# EAGLE board ADXL344 (EAGLE 8.4.3)
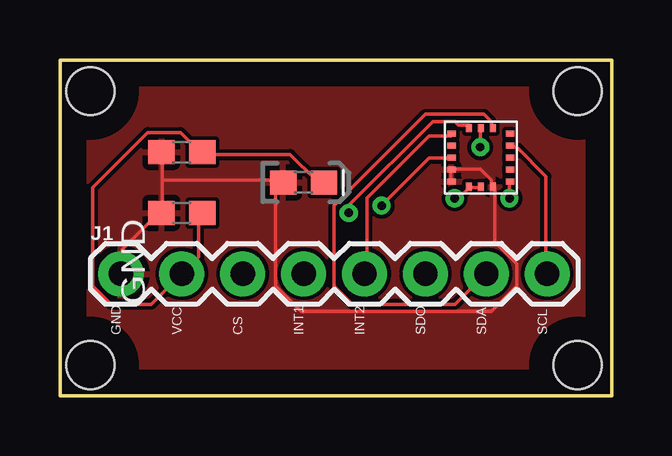
[diagram p0: board, top side]
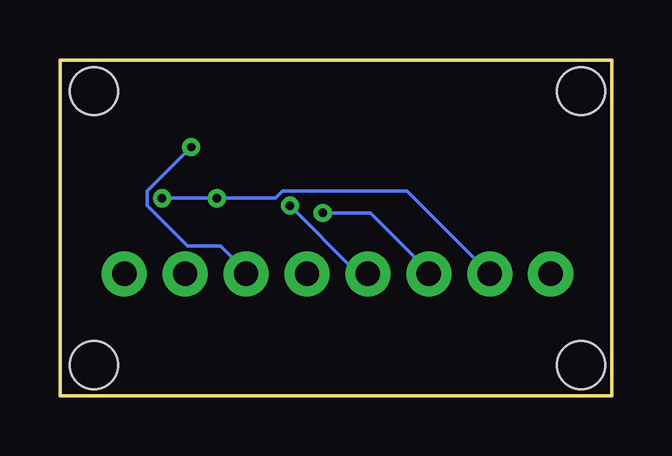
[diagram p1: board, bottom side, seen from below]

Size 23 x 14 mm. Coordinates in mm from the lower left corner, seen from the top.
Outline: 0,0 23,0 23,14 0,14 0,0
Copper layers (1*16): Top 0.035mm / dielectric 1.5mm / Bottom 0.035mm
Design rules "default": minimum track width 6mil, minimum drill 0.35mm, track to track 6mil, track to pad 6mil, pad to pad 6mil, via to via 6mil, smd to smd 6mil, copper to edge 40mil, drill to drill 6mil, minimum pad ring 10mil, minimum via ring 8mil, stop-mask expansion 4mil, vias tented up to drill 0mil, thermal gap 10mil
Holes 2 mm at 21.59,12.7 1.27,12.7 21.59,1.27 1.27,1.27

## Footprints (pad centres in the part's own frame; a part is rotated, then mirrored left to right if it is on the bottom)
ADXL-C = smd 0.25 x 0.35: CS 2,0.275; GND@1 1,2.725; RESERVED 1.5,2.725; SDA 1,0.275; SDO 1.5,0.275; VS 2,2.725 | smd 0.35 x 0.25: GND@2 2.725,2.5; GND@3 2.725,2; INT1 2.725,1.5; INT2 2.725,0.5; NC@1 2.725,1; NC@2 0.275,0.5; NC@3 0.275,1.5; NC@4 0.275,2; SCL 0.275,1; VDD 0.275,2.5
0603 = smd 1.1 x 1: 1 -0.85,0; 2 0.85,0
0603-POLAR = smd 1.1 x 1: + 0.85,0; - -0.85,0
1X08 = drill 1.016 pad 1.88: 1 0,0; 2 2.54,0; 3 5.08,0; 4 7.62,0; 5 10.16,0; 6 12.7,0; 7 15.24,0; 8 17.78,0

## Placement (x,y rotation side)
ADXL1  ADXL344ADXL-C  [ADXL-C]  19.05,11.43 180 top
C1  0.1uF  [0603]  5.08,10.16 180 top
C2  0.1uF  [0603]  5.08,7.62 180 top
C3  10uF  [0603-POLAR]  10.16,8.89 0 top
J1  [1X08]  2.54,5.08 0 top

## Library data of the parts
ADXL1 = Wavefront
C1 C2 = SparkFun-Capacitors; PROD_ID: CAP-08604
C3 = SparkFun-Capacitors; PROD_ID: CAP-13210
J1 = SparkFun-Connectors; PROD_ID: CONN-08438

## Nets
CS: ADXL1.CS J1.3
GND: ADXL1.GND@1 ADXL1.GND@2 ADXL1.GND@3 C1.2 C2.2 C3.- J1.1
INT1: ADXL1.INT1 J1.4
INT2: ADXL1.INT2 J1.5
SCL: ADXL1.SCL J1.8
SDA: ADXL1.SDA J1.7
SDO: ADXL1.SDO J1.6
VCC: ADXL1.RESERVED ADXL1.VDD ADXL1.VS C1.1 C2.1 C3.+ J1.2

## Tracks (layer width: path | path; a pad name or v marks a point on that pad's centre or on a via)
CS  (via drill 0.35)
  Top 0.152: v12.04,7.62 12.04,7.92 15.54,11.43 16.46,11.43 16.61,11.28 17.07,11.28 ADXL1.CS
  Bottom 0.152: v12.04,7.62 10.06,7.62 7.62,5.18 J1.3
GND
  Top 0.152: ADXL1.GND@2 16.31,8.99 16.31,9.45 ADXL1.GND@3 16.46,9.45 17.53,9.45 17.98,8.99 17.98,8.84 ADXL1.GND@1 18.14,8.69 18.14,6.4 19.05,5.49 19.05,4.57 17.98,3.5 10.06,3.5 8.99,4.57 8.99,8.99 | 4.27,8.99 4.27,10.06 C1.2 | 4.27,8.99 4.27,7.62 C2.2 4.12,7.62 2.59,6.1 2.59,5.18 J1.1 | 4.27,8.99 8.99,8.99 | 8.99,8.99 9.3,8.99 C3.- 8.99,8.99
  pour Top: -1.27,15.24 -1.27,-1.27 25.4,-1.27 25.4,16.51 24.13,15.24
INT1  (via drill 0.35)
  Top 0.152: v13.41,7.92 15.39,9.91 16.31,9.91 ADXL1.INT1
  Bottom 0.152: v13.41,7.92 10.67,5.18 10.21,5.18 J1.4
INT2
  Top 0.152: ADXL1.INT2 16.31,10.82 15.39,10.82 12.8,8.23 12.8,5.18 J1.5
SCL
  Top 0.152: ADXL1.SCL 18.9,10.36 19.05,10.36 20.27,9.14 20.27,5.18 J1.8
SDA
  Top 0.152: ADXL1.SDA 17.98,11.28 17.98,11.43 17.68,11.73 15.24,11.73 11.43,7.92 11.43,4.57 12.19,3.81 16.46,3.81 17.68,5.03 J1.7
SDO  (via drill 0.35)
  Top 0.152: v17.53,10.36 17.53,11.12 ADXL1.SDO
  Bottom 0.152: v17.53,10.36 19.36,8.53 19.36,7.92 17.68,6.25 16.31,6.25 15.24,5.18 J1.6
VCC  (via drill 0.35)
  Top 0.152: C3.+ 10.97,8.99 10.67,8.99 9.6,10.06 5.94,10.06 C1.1 5.79,10.21 5.03,10.97 3.66,10.97 1.37,8.69 1.37,4.57 2.13,3.81 3.81,3.81 J1.2 5.79,5.79 5.79,7.62 C2.1 | 17.07,8.69 17.53,8.69 ADXL1.RESERVED | v18.75,8.23 18.75,8.84 ADXL1.VDD | 17.07,8.69 16.61,8.23 v16.46,8.23 | 17.07,8.69 ADXL1.VS
  Bottom 0.152: v18.75,8.23 v16.46,8.23 14.02,8.23 13.72,8.53 8.53,8.53 J1.2

## Text on the board
tPlace: GND | GND | VCC | CS | INT1 | INT2 | SDO | SDA | SCL